# Altium PCB Flatcable_to_wires.PcbDoc
Units mm, origin at the board's own origin, x right, y up, seen from the top; angles counter-clockwise.
Board outline 15 x 15.4 mm, 2 copper layers (Top Layer, Bottom Layer); 21 components, 20 nets, 40 pads, 23 vias.
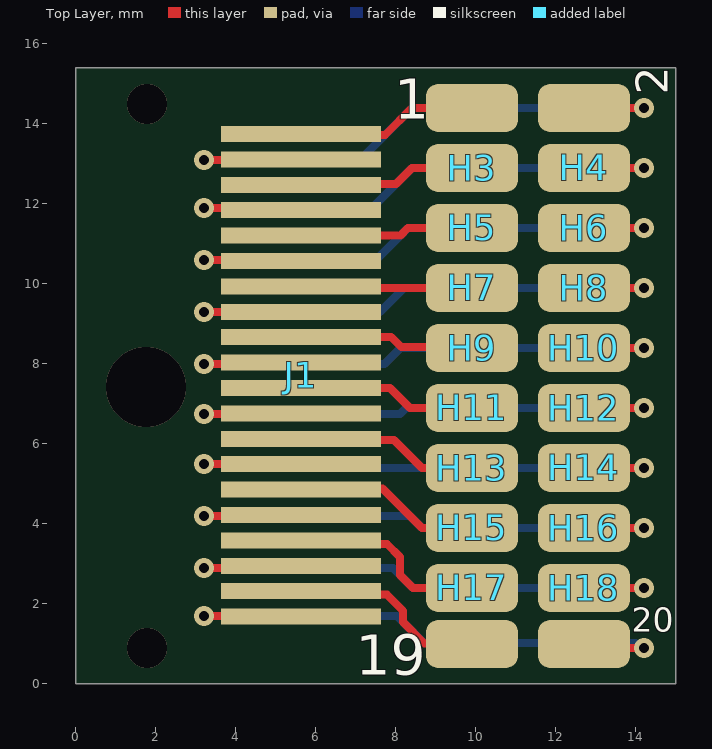
[diagram p0: Top Layer view]
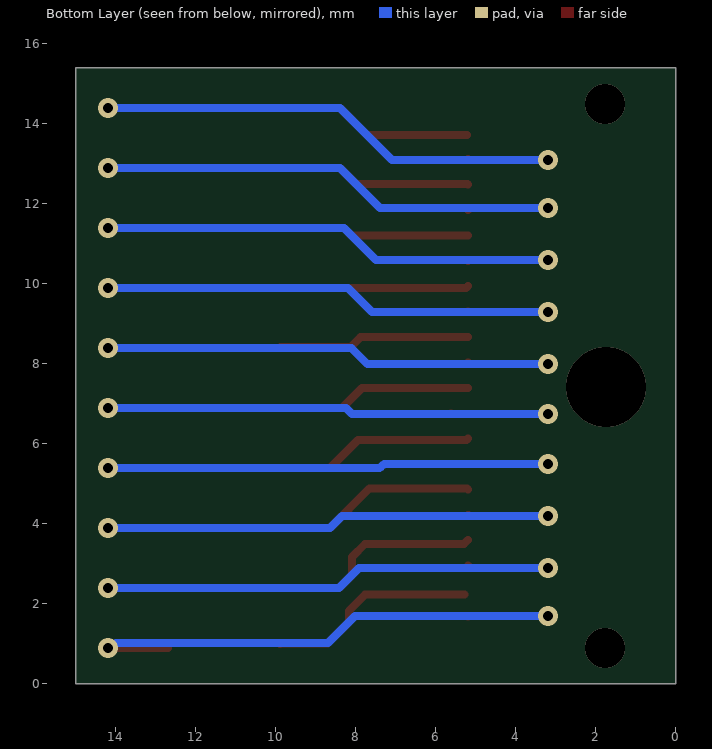
[diagram p1: Bottom Layer view, seen from below]

## Layer stack, top to bottom
Top Solder: solder mask 0.0102, Solder Resist, Dk 3.5
Top Layer: signal copper 0.0356
Dielectric 1: dielectric 0.32, FR-4, Dk 4.8
Bottom Layer: signal copper 0.0356
Bottom Solder: solder mask 0.0102, Solder Resist, Dk 3.5

## Board outline
0,15.4 15,15.4 15,0 0,0

## Design rules (kind name [scope] priority, off if disabled: settings)
Clearance [All] p1: gap=0.25 ignorepadtopadclearanceinfootprint=FALSE except(0: Arc-Hole Track-Hole SMDPad-Hole THPad-Hole Via-Hole Fill-Hole Poly-Hole Region-Hole Text-Hole; 0.15: Arc-Arc Arc-Track Track-Track; 0.2: SMDPad-SMDPad)
ComponentClearance [All] p1 off: gap=0.254 collisioncheckmode=3 verticalgap=0.254 showdistances=FALSE
HoleSize [All] p1: absolutevalues=TRUE maxlimit=6.3 minlimit=0.2 maxpercent=80.000 minpercent=20.000
MinimumAnnularRing [All] p1: minimumring=0.13
MinimumSolderMaskSliver [All] p1 off: minsoldermaskwidth=0.254
PolygonConnect [All] p1: connectstyle=Relief reliefconductorwidth=0.254 reliefentries=4 polygonreliefangle="90 Angle" airgapwidth=0.254
RoutingVias [All] p1: holewidth=0.25 width=0.5 viastyle="Through Hole" minholewidth=0.2 minwidth=0.2 maxholewidth=6.3 maxwidth=6.7
SilkToSilkClearance [All] p1: silktosilkclearance=0.15
SilkToSolderMaskClearance [IsPad] p1: minsilkscreentomaskgap=0.15 clearancetoexposedcopper=TRUE
SolderMaskExpansion [All] p1: expansion=0.102 istentingtop=FALSE useseparateexpansions=TRUE expansionbottom=0.102 istentingbottom=TRUE
Width [All] p1: maxlimit=0.5 minlimit=0.15 preferedwidth=0.3 minimp=50.000000 maximp=50.000000 favimp=50.000000
25 further rules are at their usual default settings.

## Components (designator, comment, footprint, x,y, rotation, side; value= is the part's Value field where it differs from the comment)
1 "PAD" PAD#1 9.8,14.4 r0 top (schematic designator H1)
2 "PAD" PAD#2 12.7,14.4 r0 top (schematic designator H2)
19 "PAD" PAD#3 9.8,0.9 r180 top (schematic designator H19)
20 "PAD" PAD#4 12.7,0.9 r180 top (schematic designator H20)
H3 "PAD" PAD#1 9.8,12.9 r0 top
H4 "PAD" PAD#2 12.7,12.9 r0 top
H5 "PAD" PAD#1 9.8,11.4 r0 top
H6 "PAD" PAD#2 12.7,11.4 r0 top
H7 "PAD" PAD#1 9.8,9.9 r0 top
H8 "PAD" PAD#2 12.7,9.9 r0 top
H9 "PAD" PAD#1 9.8,8.4 r0 top
H10 "PAD" PAD#2 12.7,8.4 r180 top
H11 "PAD" PAD#5 9.8,6.9 r180 top
H12 "PAD" PAD#2 12.7,6.9 r180 top
H13 "PAD" PAD#5 9.8,5.4 r180 top
H14 "PAD" PAD#2 12.7,5.4 r180 top
H15 "PAD" PAD#5 9.8,3.9 r180 top
H16 "PAD" PAD#2 12.7,3.9 r0 top
H17 "PAD" PAD#5 9.8,2.4 r180 top
H18 "PAD" PAD#2 12.7,2.4 r180 top
J1 "PADs for flat wire" "PADs for flat wire" 5.625,8.035 r270 top

## Footprints (in the part's own frame and the unit in brackets; to place one, negate y for a bottom-side part, rotate by r counter-clockwise, add the part's x,y. Pads: shape width x height; smd on the part's side, far side on the other; paste and mask are expansions set on the pad)
PAD#1 [mm]
  rrect50% 2.3x1.2 smd: 1(0.1,0)
PAD#2 [mm]
  rrect50% 2.3x1.2 smd: 1(0,0)
PAD#3 [mm]
  rrect50% 2.3x1.2 smd: 1(-0.1,-0.1)
PAD#4 [mm]
  rrect50% 2.3x1.2 smd: 1(0,-0.1)
PAD#5 [mm]
  rrect50% 2.3x1.2 smd: 1(-0.1,0)
"PADs for flat wire" [mm] "FPC Connector, 20-Leads, Right Angle, Pitch 0.5 mm, Mated Height 2.0 mm, SMT"
  rect 0.4x4 smd: 1(-5.715,0) 2(-5.08,0) 3(-4.445,0) 4(-3.81,0) 5(-3.175,0) 6(-2.54,0) 7(-1.905,0) 8(-1.27,0) 9(-0.635,0) 10(0,0) 11(0.635,0) 12(1.27,0) 13(1.905,0) 14(2.54,0) 15(3.175,0) 16(3.81,0) 17(4.445,0) 18(5.08,0) 19(5.715,0) 20(6.35,0)

## Part data
J1: "Pads for 20 pin, 0.635mm pitch flat wire.", Current (Max per Contact)=0.5A, Manufacturer=Molex, PartNumber=52745-2097, Voltage (Max)=50V, Circuits (Loaded)=20, ComponentLink1Description="Manufacturer URL", ComponentLink1URL=http://www.molex.com/molex/index.jsp, ComponentLink2Description=Datasheet, ComponentLink2URL=http://www.molex.com/webdocs/datasheets/pdf/en-us/0527452097_FFC_FPC_CONNECTORS.pdf, ComponentLink3Description="Package Specification", ComponentLink3URL=http://www.molex.com/pdm_docs/sd/527452097_sd.pdf, Contact Position=Top, Durability (mating cycles max)=20, Entry Angle="90degrees Angle", Mated Height=2.00mm, Material - Metal="Phosphor Bronze", Material - Plating Mating=Gold, Material - Plating Termination=Gold, Mounting Technology="Surface Mount", Number of Rows=1, Orientation="Right Angle", PackageDescription="20-Lead FPC Connector, Pitch 0.5 mm", PackageReference=52745-2097, PackageVersion="Rev. C, 07/2010", Packing="Tape and Reel", PCB Locator=No, PCB Retention=Yes, Pitch - Mating Interface=0.50mm, Polarized to PCB=Yes, RoHS=TRUE, Stackable=No

## Via types
v1: diameter 0.5, hole 0.25, Top Layer to Bottom Layer, tented bottom, 20 vias
v2: diameter 1, hole 1, Top Layer to Bottom Layer, tented bottom, 2 vias
v3: diameter 2, hole 2, Top Layer to Bottom Layer, tented bottom, 1 vias

## Nets (pads, with @x,y where several pads share a name; then routed paths per layer and width w, separated by ;. In a path a pad name is that pad's centre, name@x,y a point inside that pad or via, vN(x,y) a via of type N, cw(c..) or ccw(c..) an arc to the next point about the centre after c; other vN are vias at no path point)
NetH1_1: 1.1 J1.1 | length 4.6
  Top Layer w0.2: J1.1@5.225,13.73 7.73,13.73 8.4,14.4 1.1@9.5,14.4
NetH2_1: 2.1 J1.2 | length 14.6
  Top Layer w0.2: v1@3.4,13.1 5.18,13.1 J1.2@5.2,13.12 ; 2.1 v1(14.2,14.4)
  Bottom Layer w0.2: v1@3.4,13.1 7.1,13.1 8.4,14.4 v1(14.2,14.4)
  other v1: 3.2,13.1
NetH3_1: H3.1 J1.3 | length 6.3
  Top Layer w0.2: J1.3@5.2,12.485 5.215,12.5 8,12.5 8.4,12.9 ; H3.1 H3.1@9.8,12.9 ; 8.4,12.9 H3.1@9.8,12.9 ; 8.4,12.9 H3.1@9.8,12.9
NetH4_1: H4.1 J1.4 | length 14.5
  Top Layer w0.2: v1@3.4,11.9 5.15,11.9 J1.4@5.2,11.85 ; H4.1 v1(14.2,12.9)
  Bottom Layer w0.2: v1@3.4,11.9 7.4,11.9 8.4,12.9 v1(14.2,12.9)
  other v1: 3.2,11.9
NetH5_1: H5.1 J1.5 | length 4.8
  Top Layer w0.2: J1.5@5.2,11.215 8.115,11.215 8.303,11.403 9.876,11.403 cw(c9.876,11.303) 9.892,11.402 H5.1@9.9,11.4
NetH6_1: H6.1 J1.6 | length 14.4
  Top Layer w0.2: v1@3.4,10.6 5.18,10.6 J1.6@5.2,10.58 ; H6.1 v1(14.2,11.4)
  Bottom Layer w0.2: v1@3.4,10.6 7.5,10.6 8.3,11.4 v1(14.2,11.4)
  other v1: 3.2,10.6
NetH7_1: H7.1 J1.7 | length 4.7
  Top Layer w0.2: J1.7@5.2,9.945 5.245,9.9 H7.1
NetH8_1: H8.1 J1.8 | length 14.4
  Top Layer w0.2: v1@3.4,9.3 5.19,9.3 J1.8@5.2,9.31 ; H8.1 v1(14.2,9.9)
  Bottom Layer w0.2: v1@3.4,9.3 7.6,9.3 8.2,9.9 v1(14.2,9.9)
  other v1: 3.2,9.3
NetH9_1: H9.1 J1.9 | length 4.8
  Top Layer w0.2: J1.9@5.2,8.675 7.881,8.675 8.136,8.419 9.881,8.419 H9.1
NetH10_1: H10.1 J1.10 | length 14.3
  Top Layer w0.2: v1@3.4,8 5.119,8 ccw(c5.119,8.1) 5.189,8.029 J1.10@5.2,8.04 ; H10.1 v1(14.2,8.4)
  Bottom Layer w0.2: v1@3.4,8 7.717,8 8.117,8.4 v1(14.2,8.4)
  other v1: 3.2,8
NetH11_1: H11.1 J1.11 | length 4.9
  Top Layer w0.2: J1.11@5.205,7.4 7.85,7.4 8.35,6.9 H11.1
NetH12_1: H12.1 J1.12 | length 15
  Top Layer w0.2: v1(3.2,6.75) 5.61,6.75 J1.12 ; H12.1 v1(14.2,6.9)
  Bottom Layer w0.2: v1(3.2,6.75) 8.1,6.75 8.25,6.9 v1(14.2,6.9)
NetH13_1: H13.1 J1.13 | length 5
  Top Layer w0.2: J1.13@5.2,6.135 5.215,6.12 5.235,6.1 7.95,6.1 8.65,5.4 H13.1
NetH14_1: H14.1 J1.14 | length 14.1
  Top Layer w0.2: v1@3.4,5.5 J1.14@5.2,5.5 ; H14.1 v1(14.2,5.4)
  Bottom Layer w0.2: v1@3.4,5.5 7.259,5.5 cw(c7.259,5.4) 7.33,5.47 7.371,5.429 ccw(c7.441,5.5) 7.441,5.4 v1(14.2,5.4)
  other v1: 3.2,5.5
NetH15_1: H15.1 J1.15 | length 5.1
  Top Layer w0.2: J1.15@5.2,4.865 5.219,4.884 7.666,4.884 8.65,3.9 H15.1
NetH16_1: H16.1 J1.16 | length 14.2
  Top Layer w0.2: v1@3.4,4.2 5.129,4.2 ccw(c5.129,4.3) J1.16@5.199,4.229 ; H16.1 v1(14.2,3.9)
  Bottom Layer w0.2: v1@3.4,4.2 8.35,4.2 8.65,3.9 v1(14.2,3.9)
  other v1: 3.2,4.2
NetH17_1: H17.1 J1.17 | length 5.5
  Top Layer w0.2: J1.17@5.205,3.6 5.3,3.505 7.77,3.505 8.097,3.177 8.097,2.728 8.425,2.4 H17.1
NetH18_1: H18.1 J1.18 | length 14.3
  Top Layer w0.2: v1@3.4,2.9 5.099,2.9 ccw(c5.099,3) 5.169,2.929 J1.18@5.2,2.96 ; H18.1 v1(14.2,2.4)
  Bottom Layer w0.2: v1@3.4,2.9 7.925,2.9 8.425,2.4 v1(14.2,2.4)
  other v1: 3.2,2.9
NetH19_1: 19.1 J1.19 | length 5.3
  Top Layer w0.2: J1.19@5.29,2.235 7.77,2.235 8.175,1.83 8.175,1.55 8.709,1.016 9.884,1.016 19.1
NetH20_1: 20.1 J1.20 | length 14.4
  Top Layer w0.2: v1@3.4,1.7 5.19,1.7 J1.20@5.2,1.69 ; 20.1@12.7,0.9 v1(14.2,0.9)
  Bottom Layer w0.2: v1@3.4,1.7 8.025,1.7 8.7,1.025 13.994,1.025 14.119,0.9 v1(14.2,0.9)
  other v1: 3.2,1.7
copper on no net:
  other v2: 1.775,0.9 1.775,14.5
  other v3: 1.75,7.425

## Silkscreen, mask and mechanical layers (free items; w line width, h text height)
Mechanical 1:
  the board outline again, w0.1